# Altium PCB PCB1.PcbDoc
Units mm, origin at the board's own origin, x right, y up, seen from the top; angles counter-clockwise.
Board outline 124 x 14 mm, 2 copper layers (Top Layer, Bottom Layer); 41 components, 33 nets, 191 pads, 67 vias.
Unrouted connection lines stored in the file: 4.
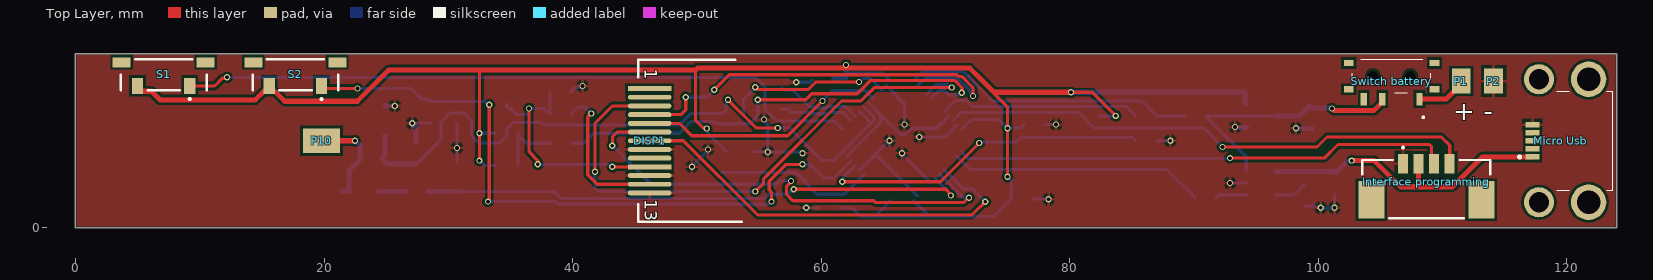
[diagram p0: Top Layer view]
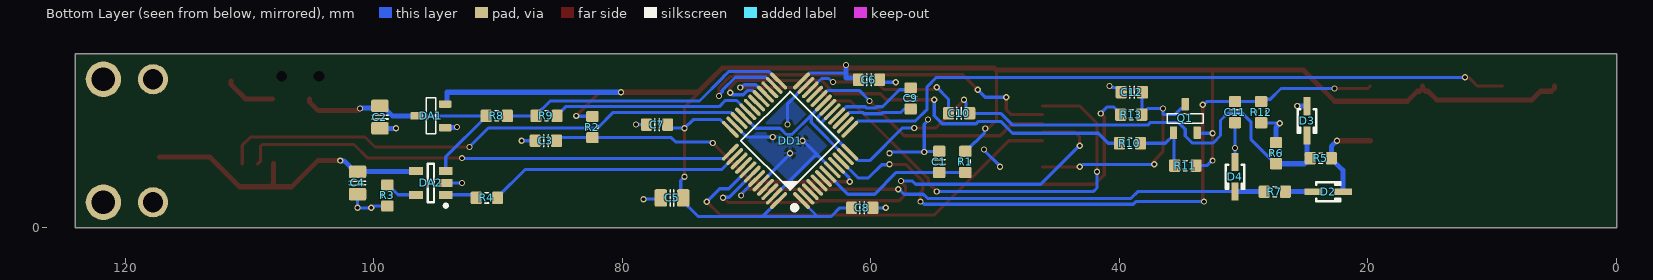
[diagram p1: Bottom Layer view, seen from below]
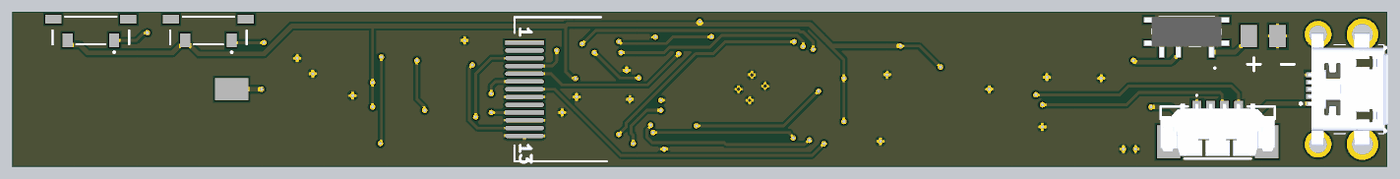
[diagram p2: 3D render of the assembled board from above, using the file's embedded part models]
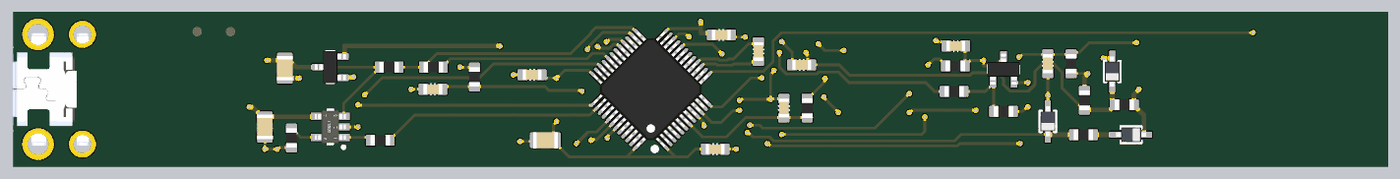
[diagram p3: 3D render of the assembled board from below, using the file's embedded part models]

## Layer stack, top to bottom
Top Solder: solder mask 0.0102, Solder Resist, Dk 3.5
Top Layer: signal copper 0.0356
Dielectric 1: dielectric 0.32, FR-4, Dk 4.8
Bottom Layer: signal copper 0.0356
Bottom Solder: solder mask 0.0102, Solder Resist, Dk 3.5

## Board outline
0,0 0,14 124,14 124,0

## Design rules (kind name [scope] priority, off if disabled: settings)
Clearance [All] p1: gap=0.2 ignorepadtopadclearanceinfootprint=FALSE except(0: Arc-Hole Track-Hole SMDPad-Hole THPad-Hole Via-Hole Fill-Hole Poly-Hole Region-Hole Text-Hole; 0.19: SMDPad-SMDPad)
PolygonConnect [All] p1: connectstyle=Relief reliefconductorwidth=0.254 reliefentries=4 polygonreliefangle="90 Angle" airgapwidth=0.254
RoutingVias [All] p1: holewidth=0.3 width=0.5 viastyle="Through Hole" minholewidth=0.3 minwidth=0.5 maxholewidth=0.3 maxwidth=0.5
SolderMaskExpansion [All] p1: expansion=0.102 istentingtop=FALSE
Width [All] p1: maxlimit=0.406 minlimit=0.254 preferedwidth=0.254
30 further rules are at their usual default settings.

## Components (designator, comment, footprint, x,y, rotation, side; value= is the part's Value field where it differs from the comment)
C1 "100nF" CAPC1608X90N 54.5,5.3 r270 bottom
C2 "2.2uF" CAPC2012X135N 99.5,8.9 r270 bottom
C3 "100nF" CAPC1608X90N 86.15,7 r180 bottom
C4 "4.7uF" CAPC2012X135N 101.3,3.6 r90 bottom
C5 "1uF" CAPC2012X135N 76,2.4 r180 bottom
C6 "100nF" CAPC1608X90N 60.15,11.9 r0 bottom
C7 "100nF" CAPC1608X90N 77.2,8.3 r180 bottom
C8 "100nF" CAPC1608X90N 60.7,1.6 r0 bottom
C9 "10pF" CAPC1608X90N 56.8,10.4 r270 bottom
C10 "NC" CAPC1608X90N 52.9,9.2 r0 bottom
C11 "100nF" CAPC1608X90N 30.7,9.3 r270 bottom
C12 "100nF" CAPC1608X90N 39,10.9 r0 bottom
D2 "pmeg4005aea" SOD-323F/SC-90_INV 23.2,2.9 r0 bottom
D3 "BZX384-C4V7.115" SOD-323F/SC-90_INV 24.9,8.6 r90 bottom
D4 "pmeg4005aea" SOD-323F/SC-90_INV 30.7,4.1 r90 bottom
DA1 "MCP1702T" SOT23-3 95.4,9 r0 bottom
DA2 "MCP73831" SOT23-5 95.4,3.6 r0 bottom
DD1 "STM32F303CBT6" LQFP-48_N 66.5,7 r45 bottom
DISP1 "LCD 160x80" LCD_160_80 46.2,11.2 r270 top
"Interface programming" "1734261-4" 17342614 108.7,3.1 r180 top
"Micro Usb" "0476420001" 0476420001 120.4,7 r90 top
P1 "PWR" Ext_pad_2 111.5,13.3 r0 top
P2 "GND" Ext_pad_2 114.1,13.3 r0 top
P10 "SIGNAL" Ext_pad 19.8,8.4 r0 top
Q1 "IRLML6402" SOT23-3 34.7,8.8 r90 bottom
R1 "10K" RESC1608X55N 52.4,5.3 r270 bottom
R2 "100" RESC1608X55N 82.4,8.1 r90 bottom
R3 "2K" RESC1608X55N 98.9,2.6 r270 bottom
R4 "2K" RESC1608X55N 90.9,2.4 r0 bottom
R5 "100K" RESC1608X55N 23.8,5.6 r0 bottom
R6 "10K" RESC1608X55N 27.4,6 r90 bottom
R7 "1K" RESC1608X55N 27.5,2.9 r0 bottom
R8 "100K" RESC1608X55N 90.1,9 r180 bottom
R9 "100K" RESC1608X55N 86.1,9 r180 bottom
R10 "1K" RESC1608X55N 39.15,6.8 r180 bottom
R11 "100K" RESC1608X55N 34.7,5 r180 bottom
R12 "10K" RESC1608X55N 28.6,9.3 r270 bottom
R13 "82" RESC1608X55N 39.05,9.1 r0 bottom
S1 "TL3330AF260QG" TL3330 7.1,12.3 r180 top
S2 "TL3330AF260QG" TL3330 17.7,12.3 r180 top
"Switch battery" "MSK12C02" MSK12C02 105.9,12.2 r180 top

## Footprints (in the part's own frame and the unit in brackets; to place one, negate y for a bottom-side part, rotate by r counter-clockwise, add the part's x,y. Pads: shape width x height; smd on the part's side, far side on the other; paste and mask are expansions set on the pad)
17342614 [mm]
  rect 0.8x1.6 smd: 1(1.875,-2.05) 2(0.625,-2.05) 3(-0.625,-2.05) 4(-1.875,-2.05)
  rect 2.1x3 smd: MP1(4.425,0.85) MP2(-4.425,0.85)
  silkscreen extent -5.15,-3.4 5.15,2.35, body extent -5.15,-2.6 5.15,2.1, height 3.45
0476420001 [mm]
  rect 0.45x1.1 smd: 1(-1.3,3.17) 2(-0.65,3.17) 3(0,3.17) 4(0.65,3.17) 5(1.3,3.17)
  round 2.423 hole 1.616: MH1(-4.95,2.65) MH2(4.95,2.65)
  round 2.846 hole 1.897: MH3(-4.95,-1.35) MH4(4.95,-1.35)
  silkscreen extent -4,-3.3 4,4.3, body extent -5.1,-3.68 5.1,3.55, height 1.81
CAPC1608X90N [mm]
  round 0.254 on Mech15: 0(0,0)
  rrect25% 0.9x1 smd: 1(-0.85,0) 2(0.85,0)
  Top Layer pour cut-out: -0.6,0.5 -0.4,0.7 0.4,0.7 0.6,0.5 0.6,-0.5 0.4,-0.7 -0.4,-0.7 -0.6,-0.5
  silkscreen extent -0.18,-0.48 0.18,0.48, body extent -0.85,-0.45 0.85,0.45, height 0.89
CAPC2012X135N [mm]
  round 0.254 on Mech15: 0(0,0)
  rrect25% 1x1.4 smd: 1(-0.9,0) 2(0.9,0)
  Top Layer pour cut-out: -0.675,0.7 -0.475,0.9 0.475,0.9 0.675,0.7 0.675,-0.7 0.475,-0.9 -0.475,-0.9 -0.675,-0.7
  silkscreen extent -0.15,-0.65 0.15,0.65, body extent -1.1,-0.72 1.1,0.73, height 1.34
Ext_pad [mm]
  rect 3x2 smd: 1(0,-1.4)
Ext_pad_2 [mm]
  rect 1.5x2 smd: 1(0,-1.5)
LCD_160_80 [mm]
  rect 0.4x3.5 smd: 1(0,0) 10(6.3,0)
  oval 0.4x3.5 smd: 2(0.7,0) 3(1.4,0) 4(2.1,0) 5(2.8,0) 6(3.5,0) 7(4.2,0) 8(4.9,0) 9(5.6,0) 11(7,0) 12(7.7,0) 13(8.4,0)
  silkscreen extent -2.3,-0.9 10.7,7.4
LQFP-48_N [mm]
  round 1 on Mech15: 0(0,0)
  oval 1.8x0.3 smd: 1(-4.05,2.75) 2(-4.05,2.25) 3(-4.05,1.75) 4(-4.05,1.25) 5(-4.05,0.75) 6(-4.05,0.25) 7(-4.05,-0.25) 8(-4.05,-0.75) 9(-4.05,-1.25) 10(-4.05,-1.75) 11(-4.05,-2.25) 12(-4.05,-2.75) 25(4.05,-2.75) 26(4.05,-2.25) 27(4.05,-1.75) 28(4.05,-1.25) 29(4.05,-0.75) 30(4.05,-0.25) 31(4.05,0.25) 32(4.05,0.75) 33(4.05,1.25) 34(4.05,1.75) 35(4.05,2.25) 36(4.05,2.75)
  oval 0.3x1.8 smd: 13(-2.75,-4.05) 14(-2.25,-4.05) 15(-1.75,-4.05) 16(-1.25,-4.05) 17(-0.75,-4.05) 18(-0.25,-4.05) 19(0.25,-4.05) 20(0.75,-4.05) 21(1.25,-4.05) 22(1.75,-4.05) 23(2.25,-4.05) 24(2.75,-4.05) 37(2.75,4.05) 38(2.25,4.05) 39(1.75,4.05) 40(1.25,4.05) 41(0.75,4.05) 42(0.25,4.05) 43(-0.25,4.05) 44(-0.75,4.05) 45(-1.25,4.05) 46(-1.75,4.05) 47(-2.25,4.05) 48(-2.75,4.05)
  silkscreen extent -4.25,-2.79 2.79,3.75, body extent -4.5,-4.5 4.5,4.5, height 1.59
MSK12C02 [mm]
  rect 0.5x1 smd: A1(-2.25,1.85) B1(0.75,1.85) C1(2.25,1.85)
  round 0.425 hole 0.85 unplated: MH1(-1.5,0) MH2(1.5,0)
  rect 0.8x0.5 smd: MP1(3.45,1.05) MP2(3.45,-1.05) MP3(-3.45,-1.05) MP4(-3.45,1.05)
  silkscreen extent -3.15,-1.35 3.15,3.35, body extent -3.8,-1.35 3.8,2.3, height 1.5
RESC1608X55N [mm]
  round 0.254 on Mech15: 0(0,0)
  rrect25% 0.9x1 smd: 1(-0.85,0) 2(0.85,0)
  Top Layer pour cut-out: -0.6,0.5 -0.4,0.7 0.4,0.7 0.6,0.5 0.6,-0.5 0.4,-0.7 -0.4,-0.7 -0.6,-0.5
  silkscreen extent -0.15,-0.41 0.15,0.41, body extent -0.87,-0.47 0.88,0.48, height 0.54
SOD-323F/SC-90_INV [mm]
  rect 1.45x0.55 smd: 1(1.175,0) 2(-1.175,0)
  silkscreen extent -0.95,-0.75 0.95,0.75, body extent -1.35,-0.67 1.35,0.68, height 0.79
SOT23-3 [mm]
  round 0.5 on Mech15: 0(0,0)
  rrect25% 1x0.6 smd: 1(-1.15,0.95) 2(-1.15,-0.95) 3(1.15,0)
  silkscreen extent -0.38,-1.45 0.38,1.45, body extent -1.4,-1.45 1.4,1.45, height 1.29
SOT23-5 [mm]
  rect 1.1x0.65 smd: 1(-1.2,0.95) 2(-1.2,0) 3(-1.2,-0.95) 4(1.2,-0.95) 5(1.2,0.95)
  silkscreen extent -1.32,-1.55 0.25,1.95, body extent -1.4,-1.45 1.4,1.45, height 1.14
TL3330 [mm]
  rect 0.9x1.27 smd: 1(-2.1,0.885) 2(2.1,0.885)
  rect 1.45x0.8 smd: 3(-3.375,-1) 4(3.375,-1)
  silkscreen extent -3.45,-1.25 3.45,2.02

## Part data
C1 C2 C3 C4 C5 C6 C7 C8 C9 C10 C11 C12: library part CC0805, "Chip capacitor", Voltage=25V, Series=X7R
D2 D4: library part "D Schottky", "Schottky Diode", Code_JEDEC=DO-214-AA, LatestRevisionDate=17-Jul-2002, LatestRevisionNote="Re-released for DXP Platform.", PackageDescription="DO-214-AA/SMB; 2 C-Bend Leads; Body 5.3 x 3.6 mm, inc. leads (LxW)", PackageReference=SMB, Published=8-Jun-2000, Publisher="Altium Limited"
D3: library part "D Zener", "Zener Diode", LatestRevisionDate=17-Jul-2002, LatestRevisionNote="Re-released for DXP Platform.", PackageDescription="Diode, Thru-Hole; 2 Leads; 0.7 in Pin Spacing", PackageReference=DIODE-0.7, Published=8-Jun-2000, Publisher="Altium Limited"
DA1: "Linear voltage regulator"
DA2: "Li-Ion Charger"
DD1: library part STM32F3_LQFP48, "Microcontroller"
DISP1: library part LCD_160x80
"Interface programming": "Connector", Manufacturer_Name="TE Connectivity", Mouser Part Number=571-1734261-4, Arrow Part Number=1734261-4, Arrow Price/Stock=https://www.arrow.com/en/products/1734261-4/te-connectivity?region=nac, Datasheet Link=https://www.te.com/commerce/DocumentDelivery/DDEController?Action=showdoc&DocId=Customer+Drawing%7F1734261%7FA3%7Fpdf%7FEnglish%7FENG_CD_1734261_A3.pdf%7F1734261-4, Height=3.7mm, Manufacturer_Part_Number=1734261-4, Mouser Price/Stock=https://www.mouser.co.uk/ProductDetail/TE-Connectivity-AMP/1734261-4?qs=%252BMxOCPyBJh%252BxywytzbuocA%3D%3D
"Micro Usb": "Connector", Manufacturer_Name=Molex, Mouser Part Number=N/A, Arrow Part Number=0476420001, Arrow Price/Stock=https://www.arrow.com/en/products/0476420001/molex?region=nac, Datasheet Link=https://www.molex.com/pdm_docs/sd/476420001_sd.pdf, Height=2.94mm, Manufacturer_Part_Number=0476420001, Mouser Price/Stock=https://www.mouser.co.uk/ProductDetail/Molex/0476420001?qs=PBcRNPEHKsrxICNNodjW6Q%3D%3D
P1 P2 P10: library part "Ext Pad", "Pad for wire"
Q1: library part MOSFET_RZR025P01TL, "MOSFET SMD P-CH", Manufacturer 1="Rohm Semiconductor", Manufacturer Part Number 1=RZR025P01TL, Package / Case="SOT23-3; TSMT3", Ratings="12V; 2.5A; 1W", Supplier Part Number 1=RZR025P01TLCT-ND, Rds On (Max) @ Id, Vgs="61 mOhm @ 2.5A, 4.5V", SCDType=spec, Supplier 1=Digi-Key
R1 R2 R3 R4 R5 R6 R7 R8 R9 R10 R11 R12 R13: library part RC0805, "Chip resistor", Tolerance=5%
S1 S2: "Switch", Manufacturer_Name=E-Switch, Mouser Part Number=612-TL3330AF260QG, Datasheet Link=https://datasheet.datasheetarchive.com/originals/distributors/SFDatasheet-1/sf-00021243.pdf, Manufacturer_Part_Number=TL3330AF260QG, Mouser Price/Stock=https://www.mouser.co.uk/ProductDetail/E-Switch/TL3330AF260QG?qs=cyOInwlKnROnXHK5BnOqnQ%3D%3D
"Switch battery": "Switch", Manufacturer_Name="Shou Han", Datasheet Link=https://shouhan.en.made-in-china.com/product/xsMEmqgOAXWB/China-Slide-Switch-Msk12c02-Slide-Switch-on-off-2-Position-1p2t-Spdt-Miniature-Horizontal-SMD-7p-Slide-Switch.html, Height=1.4mm, Manufacturer_Part_Number=MSK12C02

## Via types
v1: diameter 0.5, hole 0.3, Top Layer to Bottom Layer, 67 vias

## Nets (pads, with @x,y where several pads share a name; then routed paths per layer and width w, separated by ;. In a path a pad name is that pad's centre, name@x,y a point inside that pad or via, vN(x,y) a via of type N, cw(c..) or ccw(c..) an arc to the next point about the centre after c; other vN are vias at no path point)
BAT_VOLT: DD1.25 R8.2 R9.1 | length 23.7
  Bottom Layer w0.254: DD1.25 67.432,11.808 68.186,12.563 71.453,12.563 71.877,12.139 71.877,12.107 73.784,10.2 85.8,10.2 86.95,9.05 R9.1 R8.2
BTN2: DD1.13 S1.1 | length 55.6
  Top Layer w0.254: S1.1@9.2,11.4 11.2,11.4 11.858,12.058 12.158,12.058 v1(12.2,12.1)
  Bottom Layer w0.254: v1(12.2,12.1) 54.716,12.1 55.477,11.339 55.477,9.526 56.403,8.6 61.011,8.6 DD1.13
CHARGE: DD1.38 R4.1 | length 20.5
  Bottom Layer w0.254: DD1.38 71.995,4.687 87.813,4.687 90.05,2.45 R4.1
COMP4_OUT: DD1.11 DD1.19 DD1.33 | length 12.6
  Bottom Layer w0.254: DD1.11 64.8,8.482 64.8,9.054 ; DD1.19 64.8,9.054 ; DD1.33 69.268,8 67.3,8 66.8,7.5 66.354,7.5 64.8,9.054
COMP6_INP: C10.2 DD1.22 | length 13.5
  Top Layer w0.254: v1(54.7,11.3) 54.877,11.123 58.949,11.123 59.557,11.731 v1(63.052,11.731)
  Bottom Layer w0.254: C10.2 53.75,10.35 v1(54.7,11.3) ; v1(63.052,11.731) 63.119,11.731 63.395,12.007 63.968,12.007 DD1.22
DISP_OFF: DD1.29 R10.1 | length 38
  Top Layer w0.254: v1(54.9,10.3) 58.769,10.3 59.246,10.777 62.914,10.777 63.991,11.854 70.741,11.854 71.351,11.244 71.351,10.9 v1(71.318,10.866)
  Bottom Layer w0.254: R10.1 40.9,6.8 41.7,7.6 48.6,7.6 49.554,8.554 51.349,8.554 51.53,8.373 54.27,8.373 54.9,9.003 v1(54.9,10.3) ; DD1.29 69.373,10.933 69.405,10.933 69.52,11.048 69.915,11.048 70.263,10.7 71.151,10.7 v1(71.318,10.866)
DISP_PWR: C12.1 DISP1.10 Q1.3 R13.1 | length 20.3
  Top Layer w0.254: v1(36.5,9.6) 36.5,6.1 37.2,5.4 v1(37.2,5.1) ; v1(43.2,4.9) DISP1.10
  Bottom Layer w0.254: Q1.3 34.7,9.75 34.873,9.577 35.073,9.577 35.55,9.1 36.5,9.1 v1(36.5,9.6) 37.7,9.6 37.827,9.473 37.877,9.473 R13.1@38.175,9.175 ; v1(37.2,5.1) 42.933,5.1 43.133,4.9 v1(43.2,4.9) ; C12.1 38.175,10.875 R13.1@38.175,9.175 ; R13.1@38.175,9.125 R13.1@38.175,9.175
DIV_SIGNAL: C10.1 D3.2 DD1.12 DD1.17 DD1.18 R5.2 R6.1 | length 54.4
  Top Layer w0.254: v1(52.5,10.3) 54.777,8.023 v1(56.5,8.023)
  Bottom Layer w0.254: R6.1 27.45,5.15 29.427,7.127 29.427,8.524 30.13,9.227 31.27,9.227 31.865,8.631 31.865,7.419 32.461,6.823 34.141,6.823 34.7,7.381 34.7,7.918 35.258,8.477 37.477,8.477 37.68,8.273 48.631,8.273 49.558,9.2 C10.1 52.348,9.498 52.348,10.081 52.5,10.233 v1(52.5,10.3) ; v1(56.5,8.023) 57.477,8.023 60.1,5.4 61,5.4 61.681,6.081 DD1.12 63.92,8.309 63.92,8.32 ; DD1.17 63.92,8.519 63.92,8.32 ; DD1.18 64.268,8.878 64.268,8.668 63.92,8.32
  Bottom Layer w0.406: D3.2 24.9,6.135 24.897,6.132 24.897,5.847 R5.2 24.65,5.55 24.897,5.303 24.947,5.303 25.1,5.15 R6.1
EXT_PWR: "Interface programming.2" "Micro Usb.1" C4.2 DA2.4 | length 24.8
  Top Layer w0.406: v1(102.7,5.4) 104.5,5.4 106.6,3.3 108.313,3.3 ; 108.075,5.15 108.075,3.538 108.313,3.3 ; 117.23,5.7 113.2,5.7 110.8,3.3 108.313,3.3
  Bottom Layer w0.406: DA2.4 96.625,4.525 101.275,4.525 C4.2 101.5,4.5 102.382,5.382 102.682,5.382 v1(102.7,5.4)
GND: "Interface programming.1" "Micro Usb.5" C1.1 C2.2 C3.1 C4.1 C5.1 C6.1 C7.1 C8.1 C11.2 C12.2 D3.1 D4.1 DA1.1 DA2.2 DD1.8 DD1.23 DD1.35 DD1.44 DD1.47 DISP1.8 DISP1.11 DISP1.13 P2.1 R3.2 R6.2 R12.2 | length 48.8
  Bottom Layer w0.254: v1(27.1,8.4) 27.125,8.425 28.575,8.425 R12.2 ; D4.1 C11.2 ; C12.2 39.85,10.95 40.173,11.273 40.606,11.273 40.733,11.4 v1(40.8,11.4) ; v1(49.6,4.9) 49.6,4.95 50.9,6.25 v1(50.9,6.3) ; C1.1 54.525,6.125 55.675,6.125 v1(55.7,6.1) ; v1(55.4,8.7) 55.4,8.633 55.7,8.333 v1(55.7,6.1) ; v1(58,11.7) 59.1,11.7 C6.1 ; v1@58.6,6.1 v1(58.5,6) 58.433,6 58.333,6.1 v1(55.7,6.1) ; v1(58.8,1.6) C8.1 ; DD1.8 64.234,5.795 ; DD1.23 66.7,9.982 v1(66.7,8.3) ; v1(65.5,7) 65.439,7 64.234,5.795 ; v1(66.5,6) 66.5,5.952 68.833,3.618 DD1.44 ; DD1.47 66.018,4.3 66,4.3 64.505,5.795 64.234,5.795 ; v1(67.9,7.3) 69.982,7.3 DD1.35 ; C5.1@77.1,2.3 v1(78.3,2.3) ; C7.1 v1(78.9,8.3) ; C3.1 v1(88.1,7) ; v1(92.9,3.6) DA2.2 ; R3.2 99.983,1.75 100.133,1.6 v1(100.2,1.6) v1(101.3,1.6) C4.1
  Bottom Layer w0.406: D3.1 24.925,9.8 v1(25.7,9.8) ; v1(27.1,8.4) 27.1,8.375 27.4,8.075 R6.2 ; v1(93.3,8.1) 93.318,8.082 94.218,8.082 DA1.1 ; v1(98.2,8) C2.2
  other v1: 30.7,6.423
MEAS_GND: DD1.32 R9.2 | length 16.3
  Bottom Layer w0.254: DD1.32 70.8,10.239 71.719,10.239 72.212,9.746 84.554,9.746 85.25,9.05 R9.2
NetC2_1: "Switch battery.B1" C2.1 DA1.3 DA2.3 R8.1 | length 21
  Top Layer w0.406: v1(101.1,9.6) 101.253,9.447 104.497,9.447 105.15,10.1 105.15,10.35
  Bottom Layer w0.254: DA2.3 94.2,5.7 90.95,8.95 R8.1 DA1.3
  Bottom Layer w0.406: DA1.3 98.5,9 99.3,9.8 99.482,9.618 101.082,9.618 v1(101.1,9.6)
NetC3_2: C3.2 DD1.9 R2.1 | length 26.9
  Top Layer w0.254: v1(61.7,3.7) 69.6,3.7 v1(72.721,6.821)
  Bottom Layer w0.254: v1(61.7,3.7) 61.747,3.747 61.747,4.015 DD1.9 ; v1(72.721,6.821) 72.8,6.9 75.7,6.9 76.05,7.25 R2.1 85.05,7.25 C3.2
NetD2_1: D2.1 R7.1 | length 2.3
  Bottom Layer w0.406: D2.1 R7.1
NetDA2_1: DA2.1 R4.2 | length 2.6
  Bottom Layer w0.254: R4.2 92,2.65 DA2.1
NetDA2_5: DA2.5 R3.1 | length 2.6
  Bottom Layer w0.254: DA2.5 98.05,2.65 98.85,3.45 R3.1
NetDISP1_12: DISP1.12 R13.2 | length 12.5
  Top Layer w0.254: v1(41.5,9.2) 41.223,8.923 41.223,4.261 41.984,3.5 DISP1.12
  Bottom Layer w0.254: R13.2 39.9,9.15 40.477,9.727 40.973,9.727 v1(41.5,9.2)
NetQ1_1: Q1.1 R10.2 R11.1 | length 5.8
  Bottom Layer w0.254: R11.1 35.6,5.05 35.6,7.6 Q1.1 35.65,7.45 36.3,6.8 R10.2
NRST: C1.2 DD1.7 R1.2 | length 12.9
  Bottom Layer w0.254: R1.2@52,4.45 C1.2 57.95,4.45 59.7,2.7 61.846,2.7 DD1.7
OPAMP2_NEG: C9.2 DD1.15 | length 6.1
  Bottom Layer w0.254: C9.2 57.3,9.55 57.57,9.28 59.018,9.28 59.129,9.169 60.527,9.169 60.638,9.28 61.733,9.28 62.386,8.626 DD1.15
OPAMP2_OUT: C9.1 DD1.16 | length 7
  Bottom Layer w0.254: C9.1 56.95,11.1 57.7,11.1 59.066,9.734 59.522,9.734 59.633,9.623 60.339,9.623 60.45,9.734 61.986,9.734 62.74,8.98 DD1.16
SIGNAL: D2.2 P10.1 R5.1 | length 7.9
  Top Layer w0.406: P10.1 v1(22.5,7)
  Bottom Layer w0.406: D2.2@21.503,2.972 21.575,2.9 D2.2 22.025,4.625 22.95,5.55 R5.1 22.95,6.55 v1(22.5,7)
SPI_CLK: DD1.26 DISP1.4 | length 34.5
  Top Layer w0.254: DISP1.4 48.7,9.1 49.1,9.5 v1(49.1,10.5) ; v1(51.4,11.1) 52.608,12.308 70.929,12.308 71.08,12.157 71.343,12.157 72.223,11.277 v1(72.223,10.6)
  Bottom Layer w0.254: v1(49.1,10.5) 50.8,10.5 v1(51.4,11.1) ; DD1.26 67.785,11.455 68.439,12.109 70.891,12.109 71.952,11.048 71.952,10.937 72.223,10.667 v1(72.223,10.6)
SPI_CSn: DD1.41 DISP1.7 | length 34.3
  Top Layer w0.254: DISP1.7 48.916,7 54.893,1.023 72.123,1.023 73.192,2.092 v1(73.208,2.092)
  Bottom Layer w0.254: DD1.41 71.423,3.137 72.163,3.137 v1(73.208,2.092)
SPI_DCn: DD1.20 DISP1.5 | length 20.2
  Top Layer w0.254: DISP1.5 48.6,8.4 49.6,7.4 57.3,7.4 v1(60.1,10.2)
  Bottom Layer w0.254: v1(60.1,10.2) 60.948,11.048 63.5,11.048 64.154,10.394 DD1.20
SPI_MOSI: DD1.28 DISP1.3 | length 45.1
  Top Layer w0.254: v1(41.8,4.5) 41.8,8.4 43.2,9.8 DISP1.3 ; v1(54.7,2.925) 55.369,3.594 55.369,3.929 61.64,10.2 63.2,10.2 64.277,11.277 v1(70.502,11.277)
  Bottom Layer w0.254: v1(41.8,4.5) 41.8,3.2 42.075,2.925 v1(54.7,2.925) ; DD1.28 68.492,10.748 69.247,11.502 70.21,11.502 70.435,11.277 v1(70.502,11.277)
SPI_RESn: DD1.42 DISP1.6 | length 39.1
  Top Layer w0.254: v1(43.2,6.6) 43.2,7.3 43.6,7.7 DISP1.6 ; v1(57.581,3.765) 57.581,3.698 57.223,3.34 57.223,2.679 57.725,2.177 64.238,2.177 64.392,2.023 71.456,2.023 71.833,2.4 71.884,2.4 v1(71.892,2.408)
  Bottom Layer w0.254: v1(43.2,6.6) 43.225,6.6 46.323,3.502 56.4,3.502 56.663,3.765 v1(57.581,3.765) ; DD1.42 71.407,2.447 71.853,2.447 v1(71.892,2.408)
SWCLK: "Interface programming.3" DD1.37 | length 40
  Top Layer w0.254: v1(92.9,5.6) 100.483,5.6 101.583,6.7 108.951,6.7 109.1,6.551 109.1,5.375 109.325,5.15
  Bottom Layer w0.254: DD1.37 71.83,5.559 92.859,5.559 v1(92.9,5.6)
SWDIO: "Interface programming.4" DD1.34 | length 43.5
  Top Layer w0.254: v1(92.3,6.5) 99.9,6.5 100.7,7.3 109.9,7.3 110.575,6.625 110.575,5.15
  Bottom Layer w0.254: DD1.34 70.614,8.626 71.267,9.28 80.723,9.28 81.976,8.027 90.773,8.027 v1(92.3,6.5)
TEST_SIG: D4.2 DD1.43 R7.2 | length 44.8
  Top Layer w0.254: v1(57.8,3.1) 70.1,3.1 70.1,3.004 70.438,2.667 v1(70.438,2.6)
  Bottom Layer w0.254: D4.2 38.497,2.925 39.074,2.348 55.432,2.348 55.784,2.7 57.334,2.7 57.733,3.1 v1(57.8,3.1) ; DD1.43 70.391,2.756 70.391,2.647 v1(70.438,2.6)
  Bottom Layer w0.406: R7.2 30.675,2.9 D4.2
VBAT: "Switch battery.A1" P1.1 | length 4.1
  Top Layer w0.406: 108.15,10.35 110.3,10.35 111.5,11.55 P1.1
VCC: C5.2 C6.2 C7.2 C8.2 DA1.2 DD1.1 DD1.24 DD1.36 DD1.48 Q1.2 R1.1 R2.2 R11.2 S1.2 S2.2 | length 158.7
  Top Layer w0.254: v1(32.5,5.4) v1(32.5,7.6) 32.5,12.7 ; 49.9,12.7 49.9,8.625 50.501,8.024 50.753,8.024 v1(50.8,7.977) ; 72.8,12 72.847,11.953 72.847,11.851 75,9.698 v1(75,8) v1(75,4.1) ; v1(80.1,10.9) 81.8,10.9 v1(83.7,9)
  Top Layer w0.406: S1.2 5,11.23 5.247,10.983 6.117,10.983 6.813,10.287 14.472,10.287 15.168,10.983 15.353,10.983 S2.2@15.6,11.23 ; S2.2 S2.2@15.6,11.23 ; 62,12.838 v1(62,13.1) ; v1(80.1,10.9) 73.9,10.9 72.8,12 71.962,12.838 50.038,12.838 49.9,12.7 32.5,12.7 25.2,12.7 22.675,10.175 16.84,10.175 16.032,10.983 15.847,10.983 S2.2@15.6,11.23
  Bottom Layer w0.254: v1(32.5,5.4) 32.567,5.4 32.967,5 R11.2 ; v1(32.5,7.6) 33.7,7.6 Q1.2 ; v1(50.8,7.977) 50.847,7.93 50.847,7.653 52.35,6.15 R1.1 ; C8.2 62.5,1.6 63.2,0.9 64.289,0.9 ; v1(62,13.1) 62,12.6 62.138,12.462 64.914,12.462 65.568,11.808 DD1.24 ; DD1.1 64.289,0.9 ; DD1.48 68.7,0.911 68.7,0.9 ; DD1.36 71.321,7.919 72.101,8.7 74.3,8.7 v1(75,8) 75.02,8.02 76.07,8.02 C7.2 ; v1(75,4.1) 75.3,3.8 75.3,2.3 73.9,0.9 68.7,0.9 ; R2.2 82.425,8.975 83.675,8.975 v1(83.7,9) ; 64.289,0.9 68.7,0.9
  Bottom Layer w0.406: C6.2 61.159,12.059 61.982,12.059 62,12.077 v1(62,13.1) ; v1(80.1,10.9) 94.118,10.9 94.118,10.047 94.215,9.95 DA1.2
WAKEUP: C11.1 DD1.10 R12.1 S2.1 | length 54.8
  Top Layer w0.254: S2.1 20.038,11.177 20.061,11.2 v1(22.7,11.2) ; v1(33.2,2.1) 33.2,2.167 33.3,2.267 v1(33.3,9.9) ; v1(56,2.1) 56,2.865 55.823,3.042 55.823,3.741 57.182,5.1 v1(58.5,5.1)
  Bottom Layer w0.254: v1(22.7,11.2) 27,11.2 27.868,10.332 28.418,10.332 R12.1 C11.1 32.983,10.15 33.233,9.9 v1(33.3,9.9) ; v1(33.2,2.1) 38.68,2.1 38.886,1.894 55.727,1.894 55.933,2.1 v1(56,2.1) ; v1(58.5,5.1) 58.531,5.069 59.131,5.069 60.2,4 61.025,4 DD1.10
pads on no net: "Interface programming.MP1" "Interface programming.MP2" "Micro Usb.2" "Micro Usb.3" "Micro Usb.4" "Micro Usb.MH1" "Micro Usb.MH2" "Micro Usb.MH3" "Micro Usb.MH4" "Switch battery.C1" "Switch battery.MH1" "Switch battery.MH2" "Switch battery.MP1" "Switch battery.MP2" "Switch battery.MP3" "Switch battery.MP4" C1.0 C2.0 C3.0 C4.0 C5.0 C6.0 C7.0 C8.0 C9.0 C10.0 C11.0 C12.0 DA1.0 DD1.0 DD1.2 DD1.3 DD1.4 DD1.5 DD1.6 DD1.14 DD1.21 DD1.27 DD1.30 DD1.31 DD1.39 DD1.40 DD1.45 DD1.46 DISP1.1 DISP1.2 DISP1.9 Q1.0 R1.0 R2.0 R3.0 R4.0 R5.0 R6.0 R7.0 R8.0 R9.0 R10.0 R11.0 R12.0 R13.0 S1.3 S1.4 S2.3 S2.4

## Polygon pours and split planes (outlines as drawn)
GND on Top Layer "GND_L01_P005" (solid, remove dead copper, pour order 5): 0.1,13.9 0.1,0.1 123.9,0.1 123.9,13.9
GND on Bottom Layer "GND_L02_P003" (solid, pour order 3): 63.5,6.6 66.5,3.6 69.9,7 66.5,10.4 65.2,9.1 65.2,8.3

## Silkscreen, mask and mechanical layers (free items; w line width, h text height)
Top Overlay:
  text "+ -" at 110.854,8.654 h1.52
Mechanical 1:
  lines w0.254: 0,14 0,0 124,0 124,14 ; 0,14.2 124,14.2

## Text inside footprints (layer, text, board x,y; h text height)
DISP1: Top Overlay "13" at 45.8,2.3 h1 r270; Top Overlay "1" at 45.8,12.8 h1 r270